# Altium PCB V1.PcbDoc
Units mil, origin at the board's own origin, x right, y up, seen from the top; angles counter-clockwise.
Board outline 6000 x 4000 mil, 2 copper layers (Top Layer, Bottom Layer); 38 components, 19 nets, 125 pads, 0 vias.
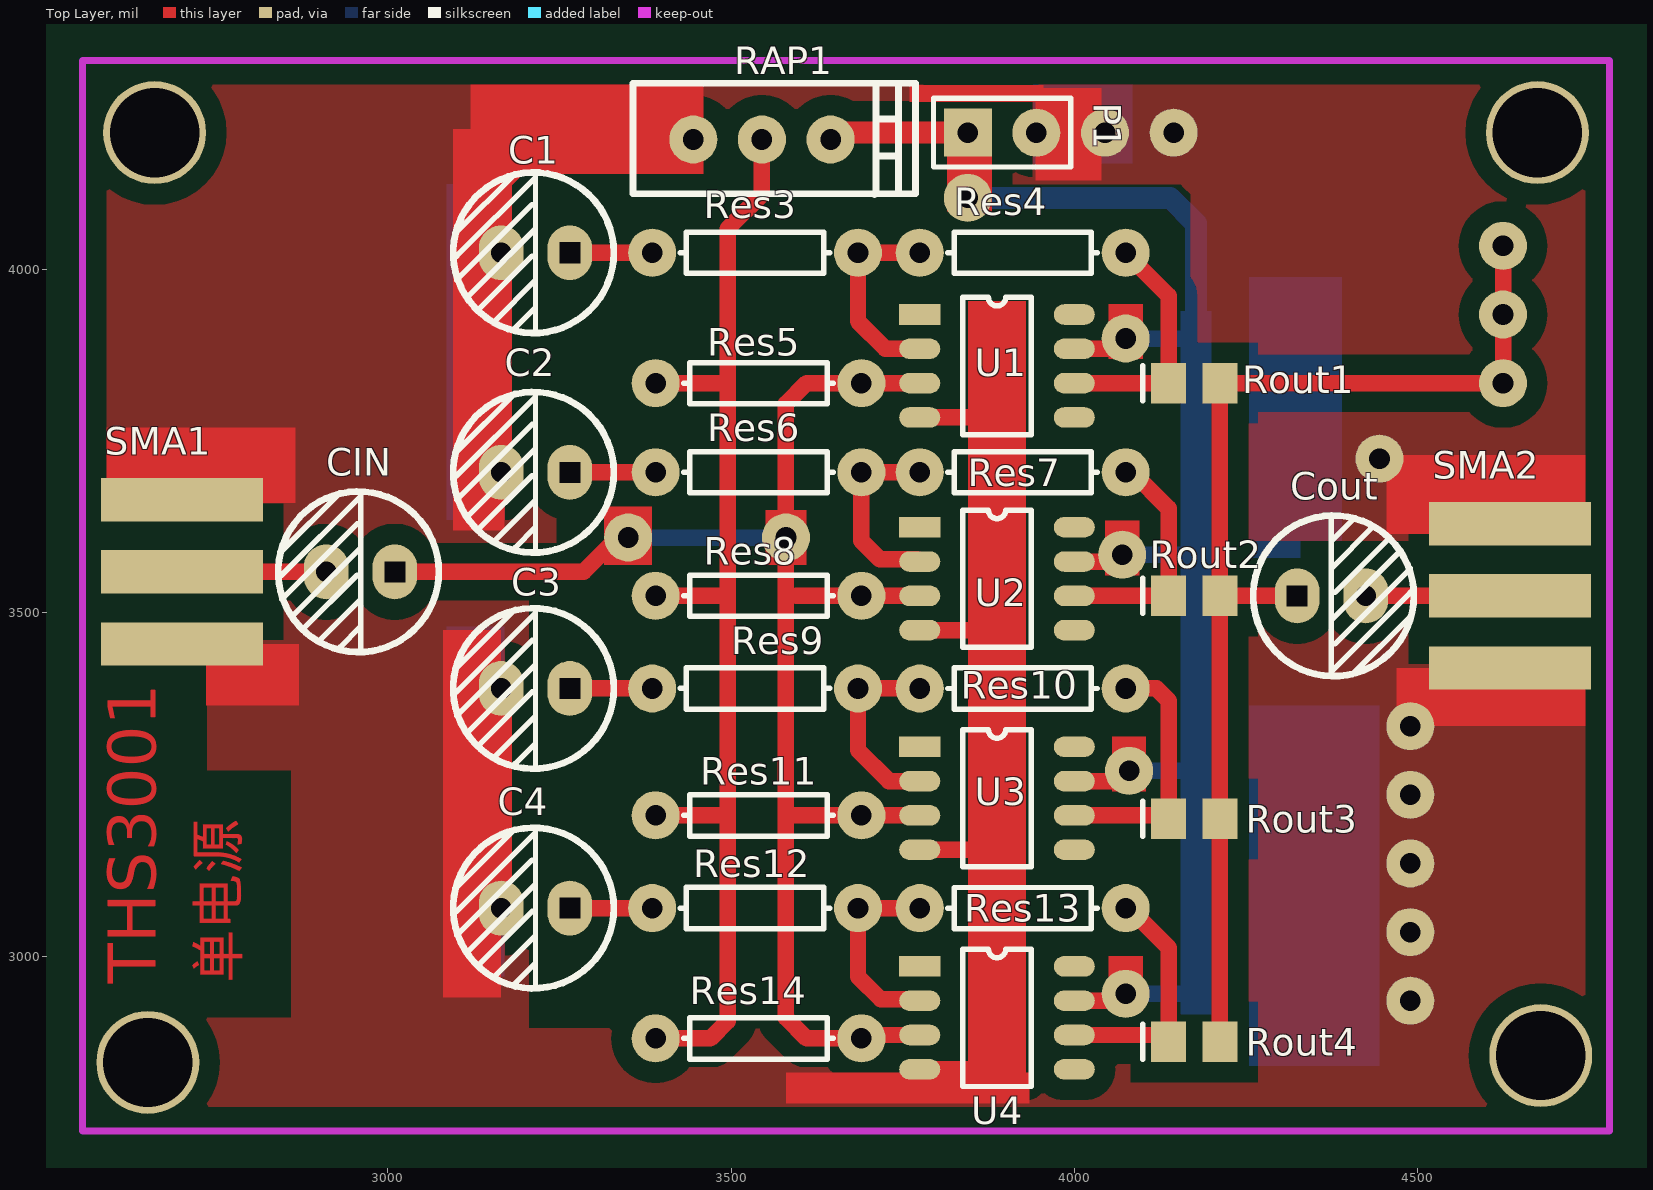
[diagram p0: Top Layer view]
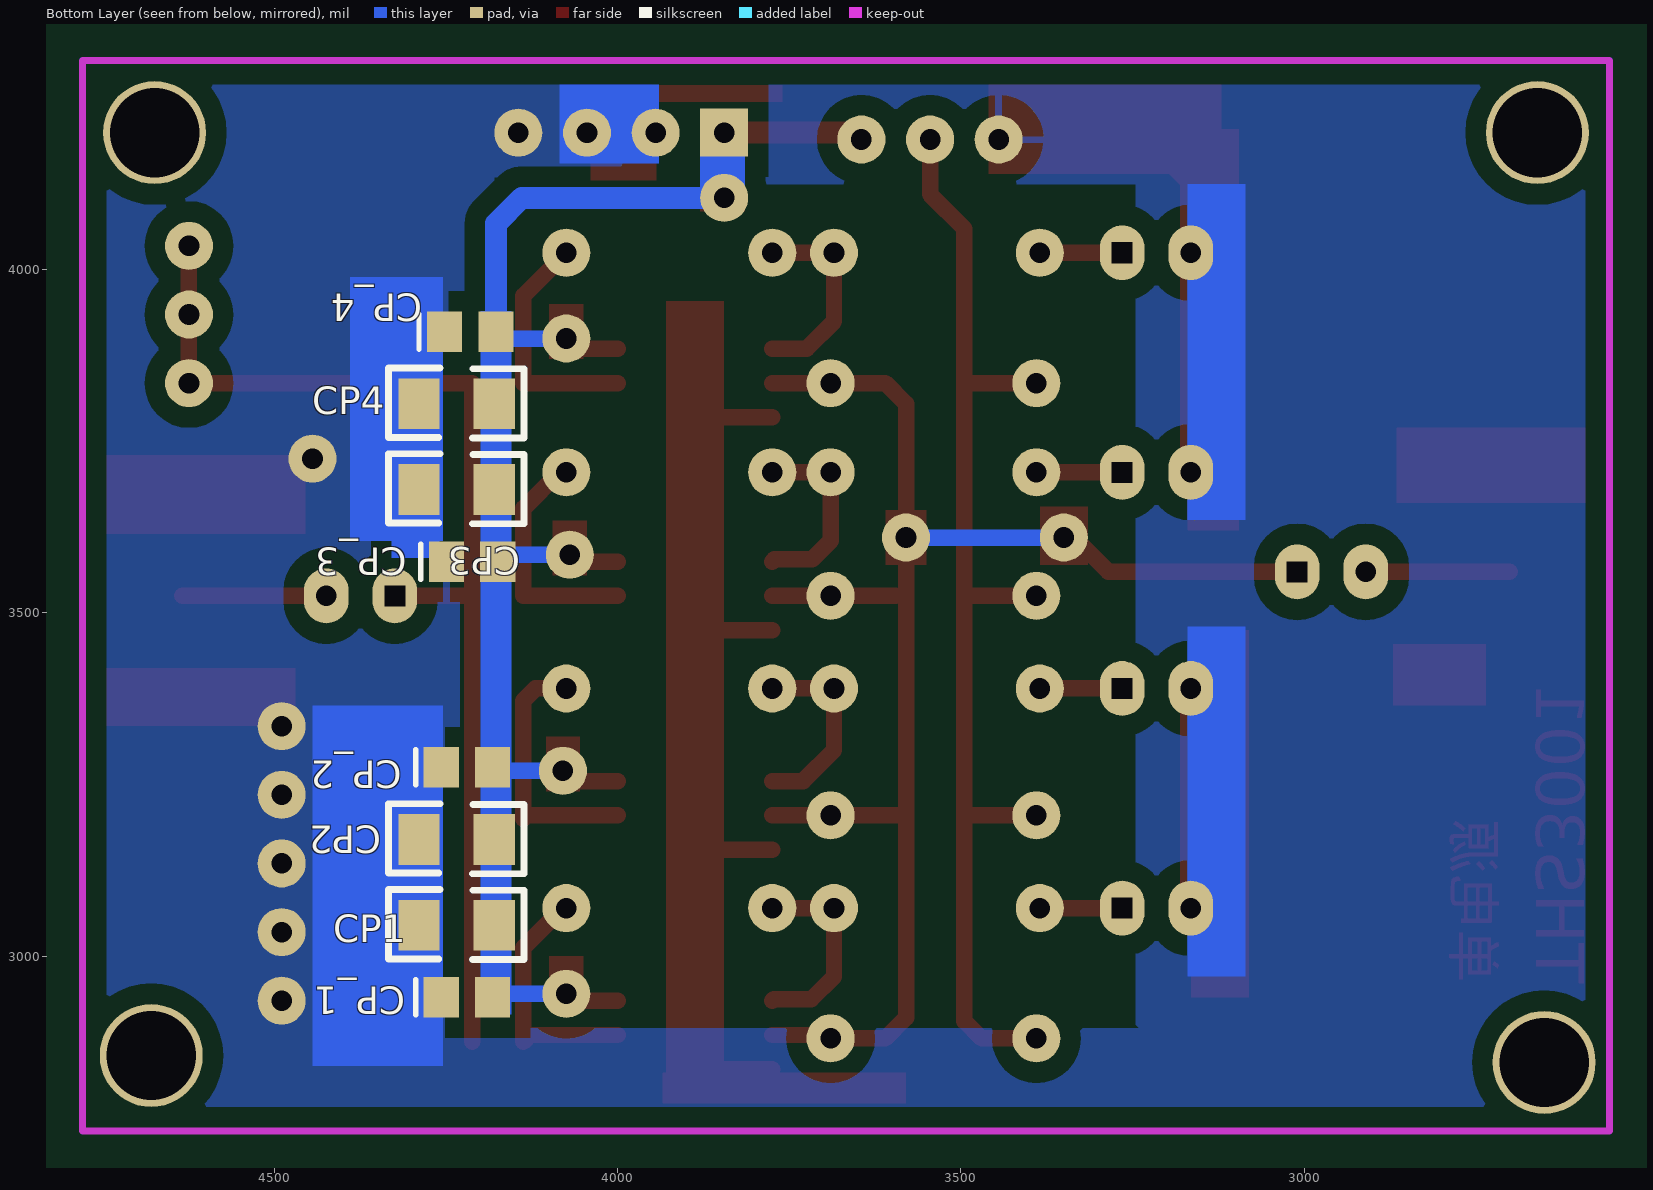
[diagram p1: Bottom Layer view, seen from below]

## Layer stack, top to bottom
Top Layer: signal copper 1.4
Dielectric: dielectric 12.6, FR-4, Dk 4.8
Bottom Layer: signal copper 1.4

## Board outline
1000,1000 7000,1000 7000,5000 1000,5000

## Design rules (kind name [scope] priority, off if disabled: settings)
Clearance [All] p1: gap=10
HoleSize [All] p1: absolutevalues=TRUE maxlimit=1000 minlimit=1 maxpercent=80.000 minpercent=20.000
HoleToHoleClearance [All] p1: gap=0 allowstackedmicrovias=TRUE
MinimumSolderMaskSliver [All] p1: minsoldermaskwidth=0
PolygonConnect [All] p1: connectstyle=Relief reliefconductorwidth=10 reliefentries=4 polygonreliefangle="90 Angle"
RoutingVias [All] p1: holewidth=28 width=50 viastyle="Through Hole" minholewidth=28 minwidth=50 maxholewidth=28 maxwidth=50
SilkToSilkClearance [All] p1: silktosilkclearance=0
SilkscreenOverComponentPads [All] p1: minsilkscreentomaskgap=0
SolderMaskExpansion [All] p1: expansion=4
TestPointUsage [All] p1: valid=0 allowmultiple=FALSE
Testpoint [All] p1: side=15 testpointundercomponent=TRUE minsize=40 maxsize=100 preferedsize=60 minholesize=0 maxholesize=40 preferedholesize=32 testpointgrid=1 style=1023 order=0-112345678
Width [All] p1: maxlimit=100 minlimit=10 preferedwidth=10
19 further rules are at their usual default settings.

## Components (designator, comment, footprint, x,y, rotation, side; value= is the part's Value field where it differs from the comment)
C1 "Cap Pol1" CAP1 3265,4025 r180 top
C2 "Cap Pol1" CAP1 3265,3705 r180 top
C3 "Cap Pol1" CAP1 3265,3390 r180 top
C4 "Cap Pol1" CAP1 3265,3070 r180 top
CIN "Cap Pol1" CAP1 3010,3560 r180 top
Cout "Cap Pol1" CAP1 4325,3525 r0 top
CP1 "Cap Pol1" CAP_BTAN 4180,3045 r0 bottom
CP2 "Cap Pol1" CAP_BTAN 4180,3170 r0 bottom
CP3 "Cap Pol1" CAP_BTAN 4180,3680 r0 bottom
CP4 "Cap Pol1" CAP_BTAN 4180,3805 r0 bottom
CP_1 "cap" C0805 4220,2940 r180 bottom
CP_2 "cap" C0805 4220,3275 r180 bottom
CP_3 "cap" C0805 4212.4,3575 r180 bottom
CP_4 "cap" C0805 4215,3910 r180 bottom
P1 "Header 2" HDR1X2 3845,4200 r0 top
RAP1 "RP1" dianweiqi 3645,4190 r270 top (schematic designator *)
Res3 "Res" R-AXIAL0.3 3685,4025 r180 top
Res4 "Res" AXIAL-0.3 3925,4025 r180 top
Res5 "Res" R-AXIAL0.3 3390,3835 r0 top
Res6 "Res" R-AXIAL0.3 3390,3705 r0 top
Res7 "Res" AXIAL-0.3 3925,3705 r0 top
Res8 "Res" R-AXIAL0.3 3390,3525 r0 top
Res9 "Res" R-AXIAL0.3 3385,3390 r0 top
Res10 "Res" AXIAL-0.3 3925,3390 r0 top
Res11 "Res" R-AXIAL0.3 3390,3205 r0 top
Res12 "Res" R-AXIAL0.3 3385,3070 r0 top
Res13 "Res" AXIAL-0.3 3925,3070 r0 top
Res14 "Res" R-AXIAL0.3 3390,2880 r0 top
Rout1 "Res" C0805 4175,3835 r0 top
Rout2 "Res" C0805 4175,3525 r0 top
Rout3 "Res" C0805 4175,3200 r0 top
Rout4 "Res" C0805 4175,2875 r0 top
SMA1 "SMA-xie" sma-xie 2600,3645 r0 top
SMA2 "SMA-xie" sma-xie 4535,3610 r0 top
U1 "THS3091" SOIC-8D 3775,3935 r0 top
U2 "THS3091" SOIC-8D 3775,3625 r0 top
U3 "THS3091" SOIC-8D 3775,3305 r0 top
U4 "THS3091" SOIC-8D 3775,2985 r0 top

## Footprints (in the part's own frame and the unit in brackets; to place one, negate y for a bottom-side part, rotate by r counter-clockwise, add the part's x,y. Pads: shape width x height; smd on the part's side, far side on the other; paste and mask are expansions set on the pad)
AXIAL-0.3 [mil] "Resistor; 2 Leads"
  round 70 hole 30: 1(-150,0) 2(150,0)
  silkscreen extent -109,-30 109,30
C0805 [mm] "Chip Capacitor; Body 2.0 x 1.2 mm (LxW typ)"
  rect 1.3x1.5 smd: 1(-0.95,0) 2(0.95,0)
  silkscreen extent -1.9,-0.65 -1.9,0.65
CAP1 [mil] "占地1*2的电容或器件均可以用它"
  oval 65x80 hole 30 square: 1(0,0)
  oval 65x80 hole 30: 2(100,0)
  silkscreen extent -64,-117 170,117
CAP_BTAN [mil]
  rect 60x74 smd: 1(0,0) 2(110,0)
  silkscreen extent -43,-52 154,50
dianweiqi [mil]
  round 70 hole 30: 1(0,0) 2(0,-100) 3(0,-200)
  silkscreen extent -82,-288 80,124
HDR1X2 [mil] "Connector; Header; 2 Position"
  rect 70x70 hole 30: 1(0,0)
  round 70 hole 30: 2(100,0)
  silkscreen extent -50,-50 150,50
R-AXIAL0.3 [mil]
  round 70 hole 30: 1(0,0) 2(300,0)
  silkscreen extent 41,-30 259,30
sma-xie [mm] "SMA接头外螺内孔，斜四角"
  rect 6x1.6 smd: 1(2.54,0.508) 2(2.54,-2.159) 3(2.54,-4.826)
SOIC-8D [mm] "封装代码为D"
  rect 1.52x0.76 smd: 1(0,0)
  oval 1.52x0.76 smd: 2(0,-1.27) 3(0,-2.54) 4(0,-3.81) 5(5.72,-3.81) 6(5.72,-2.54) 7(5.72,-1.27) 8(5.72,0)
  silkscreen extent 1.59,-4.44 4.13,0.64

## Part data
C1 C2 C3 C4 CIN Cout CP1 CP2 CP3 CP4: "Polarized Capacitor (Radial)"
CP_1 CP_2 CP_3 CP_4: "贴片电容"
P1: "Header, 2-Pin"
Res3 Res4 Res5 Res6 Res7 Res8 Res9 Res10 Res11 Res12 Res13 Res14 Rout1 Rout2 Rout3 Rout4: "适用于0805的贴片元件，包括磁珠"
SMA1 SMA2: "外螺内孔，斜角，或直四角斜着放置"
U1 U2 U3 U4: "单路高压低失真电流反馈 运放 ,通常申请DDA，即下方带有热焊盘的，有利于散热"

## Free pads (board coordinates)
  round 70 hole 30: 1(4070,3585) 2(4075,3900) 3(4080,3270) 4(4075,2945) 5(3350,3610) 6(3580,3610) 8(3845,4105) 14(4625,3835) 15(4625,3935) 16(4625,4035) 17(4490,3335) 18(4490,3235) 19(4490,3135) 20(4490,3035) 21(4490,2935) 22(4445,3725) 23(4045,4200) 24(4145,4200)
  round 150 hole 130: 7(2650,2845) 7(2660,4200) 7(4675,4200) 7(4680,2855)

## Nets (pads, with @x,y where several pads share a name; then routed paths per layer and width w, separated by ;. In a path a pad name is that pad's centre, name@x,y a point inside that pad or via, vN(x,y) a via of type N, cw(c..) or ccw(c..) an arc to the next point about the centre after c; other vN are vias at no path point)
GND: C1.2 C2.2 C3.2 C4.2 CP1.2 CP2.2 CP3.2 CP4.2 CP_1.1 CP_2.1 CP_3.1 CP_4.1 P1.2 pad.17 pad.18 pad.19 pad.20 pad.21 pad.22 pad.23 pad.24 RAP1.3 SMA1.1 SMA1.3 SMA2.1 SMA2.3 U1.4 U2.4 U3.4 U4.4 | length 1454.9
  Top Layer w24: U4.4 3885,2835 ; U3.4 3865,3155 ; U2.4 3880,3475 ; U1.4 3875,3785
  Top Layer w32: C4.2 C3.2 ; C2.2 C1.2 3165,4130 3225,4190 RAP1.3
NetC1_1: C1.1 Res3.2 | length 120
  Top Layer w24: C1.1 Res3.2
NetC2_1: C2.1 Res6.1 | length 125
  Top Layer w24: C2.1 Res6.1
NetC3_1: C3.1 Res9.1 | length 120
  Top Layer w24: C3.1 Res9.1
NetC4_1: C4.1 Res12.1 | length 120
  Top Layer w24: C4.1 Res12.1
NetCIN_1: CIN.1 pad.5 pad.6 Res5.2 Res8.2 Res11.2 Res14.2 U1.3 U2.3 U3.3 U4.3 | length 2277.6
  Top Layer w24: CIN.1 3285,3560 3335,3610 pad.5 ; 3580,3205 Res11.2 ; 3595,3525 Res8.2 U2.3 ; Res11.2@3685,3210 Res11.2 ; Res14.2 3610,2880 3580,2910 3580,3190 3580,3805 3610,3835 Res5.2 U1.3 ; Res14.2@3695,2885 U4.3 ; U3.3 Res11.2
  Bottom Layer w24: pad.5 pad.6
NetCIN_2: CIN.2 SMA1.2 | length 210
  Top Layer w24: SMA1.2 CIN.2
NetCout_1: Cout.1 pad.14 pad.15 pad.16 Rout1.2 Rout2.2 Rout3.2 Rout4.2 | length 1685.2
  Top Layer w24: Rout4.2 Rout3.2 Rout2.2 ; Cout.1 Rout2.2 ; pad.16 pad.15 pad.14 Rout1.2 Rout2.2
NetCout_2: Cout.2 SMA2.2 | length 210
  Top Layer w24: Cout.2 SMA2.2
NetRes3_1: Res3.1 Res4.2 U1.2 | length 296.6
  Top Layer w24: U1.2 3725,3885 3685,3925 Res3.1 Res4.2
NetRes4_1: Res4.1 Rout1.1 U1.6 | length 353.3
  Top Layer w24: U1.6 Rout1.1 4137.6,3962.4 Res4.1
NetRes6_2: Res6.2 Res7.1 U2.2 | length 282.4
  Top Layer w24: U2.2 3772,3578 3717,3578 3690,3605 Res6.2 Res7.1
NetRes7_2: Res7.2 Rout2.1 U2.6 | length 349.2
  Top Layer w24: U2.6 Rout2.1 4137.6,3652.4 4085,3705 Res7.2
NetRes9_2: Res9.2 Res10.1 U3.2 | length 288.6
  Top Layer w24: U3.2 3730,3255 3685,3300 Res9.2 Res10.1
NetRes10_2: Res10.2 Rout3.1 U3.6 | length 374.7
  Top Layer w24: U3.6 Rout3.1@4132.6,3205 ; Res10.2 4120,3390 4137.6,3372.4 Rout3.1
NetRes12_2: Res12.2 Res13.1 U4.2 | length 294.5
  Top Layer w24: U4.2 3773,2937 3718,2937 3685,2970 Res12.2 Res13.1
NetRes13_2: Res13.2 Rout4.1 U4.6 | length 365.4
  Top Layer w24: U4.6 4127.6,2885 Rout4.1 4137.6,3012.4 4080,3070 Res13.2
VCC: CP1.1 CP2.1 CP3.1 CP4.1 CP_1.2 CP_2.2 CP_3.2 CP_4.2 P1.1 pad.1 pad.2 pad.3 pad.4 pad.8 RAP1.1 U1.7 U2.7 U3.7 U4.7 | length 1533.6
  Top Layer w24: U4.7 pad.4@4065,2935 ; U3.7 4065,3255 pad.3 ; U2.7 4060,3575 pad.1 ; U1.7 4060,3885 pad.2
  Top Layer w32: RAP1.1 3655,4200 P1.1 pad.8
  Bottom Layer w24: pad.1 4165,3585 CP_3.2 ; pad.4 CP_1.2@4177.6,2945 ; pad.2 4167.6,3900 CP_4.2 ; pad.3 4177.6,3270 CP_2.2
  Bottom Layer w32: pad.8 4140,4105 4177.6,4067.4 CP_4.2
VREF: RAP1.2 Res5.1 Res8.1 Res11.1 Res14.1 | length 1766.1
  Top Layer w24: Res14.1 3470,2880 3495,2905 3495,3205 ; Res11.1 3495,3205 ; Res8.1 3490,3525 ; Res5.1 3495,3835 ; 3495,3785 3495,4060 3545,4110 RAP1.2 ; 3495,3820 3495,3205
pads on no net: U1.1 U1.5 U1.8 U2.1 U2.5 U2.8 U3.1 U3.5 U3.8 U4.1 U4.5 U4.8

## Polygon pours and split planes (outlines as drawn)
GND on Top Layer "Top Layer-No Net" (solid, remove dead copper, pour order 1001): 2555,3555 3230,3555 3235,3560 3245,3570 3245,4125 4155,4125 4160,4120 4170,4110 4170,3605 4780,3605 4780,4305 2555,4305 2565,4295 2565,3560
GND on Top Layer "Top Layer-No Net" (solid, remove dead copper, pour order 1000): 2555,3570 3205,3570 3205,3055 3205,2895 4220,2895 4225,2890 4254.76,2919.76 4254.76,3590.52 4774.48,3590.52 4780,3585 4780,2745 2560,2745 2555,2750 2555,3560
GND on Bottom Layer "Top Layer-No Net" (solid, remove dead copper, pour order 1002): 2555,4305 2555,2745 4780,2745 4780,4305 2550,4305 2545,4300

## Keep-outs
Keep-Out Layer:
  lines w10: 2555,2745 4780,2745 4780,4305 2555,4305 2555,2745

## Other copper
Top Layer:
  rectangle net GND: 3080,2940 3165,3475
  rectangle net GND: 3580,2785 3935,2830
  rectangle net GND: 4455,3615 4745,3730
  rectangle net GND: 3943.38,4130 4040,4265.16
  rectangle net GND: 3120,4140 3460,4270
  rectangle net GND: 3095,3620 3170,4205
  rectangle net GND: 2590,3660 2865,3770
  rectangle net GND: 2735,3365 2870,3455
  rectangle net GND: 4470,3335 4745,3420
  rectangle net NetCIN_1: 3315,3570 3385,3655
  rectangle net NetCIN_1: 3550,3570 3610,3650
  rectangle net VCC: 3815,4085 3880,4190
  rectangle net VCC: 4050,2920 4100,3000
  rectangle net VCC: 4055,3240 4105,3320
  rectangle net VCC: 4045,3555 4095,3635
  rectangle net VCC: 4050,3870 4100,3950
  rectangle net GND: 3845,2820 3930,3955
  rectangle net GND: 3760,4245 3955,4269.7
  text "THS3001" at 2685,2960 h120 r90
  text "单电源" at 2800,2960 h100 r90
Bottom Layer:
  rectangle net GND: 3940,4155 4085,4270
  rectangle net GND: 3085,3635.19 3170,4125
  rectangle net GND: 3085,2970 3170,3480
  rectangle net GND: 4255,2840 4445,3365
  rectangle net GND: 4255,3605 4390.11,3990
  rectangle net VCC: 3815,4095 3880,4220
  rectangle net GND: 4260,3580 4330,3940
  rectangle net GND: 4270,2910 4325,3305
  rectangle net VCC: 4155,2915 4200,3940
  pour cut-out: 3245,4125 3245,2900 3240,2895 4180,2895 4180,4135 4170,4125